# Altium PCB PCB3.PcbDoc
Units mm, origin at the board's own origin, x right, y up, seen from the top; angles counter-clockwise.
Board outline 118.74 x 107.19 mm, 2 copper layers (Top Layer, Bottom Layer); 55 components, 42 nets, 193 pads, 31 vias.
Unrouted connection lines stored in the file: 1.
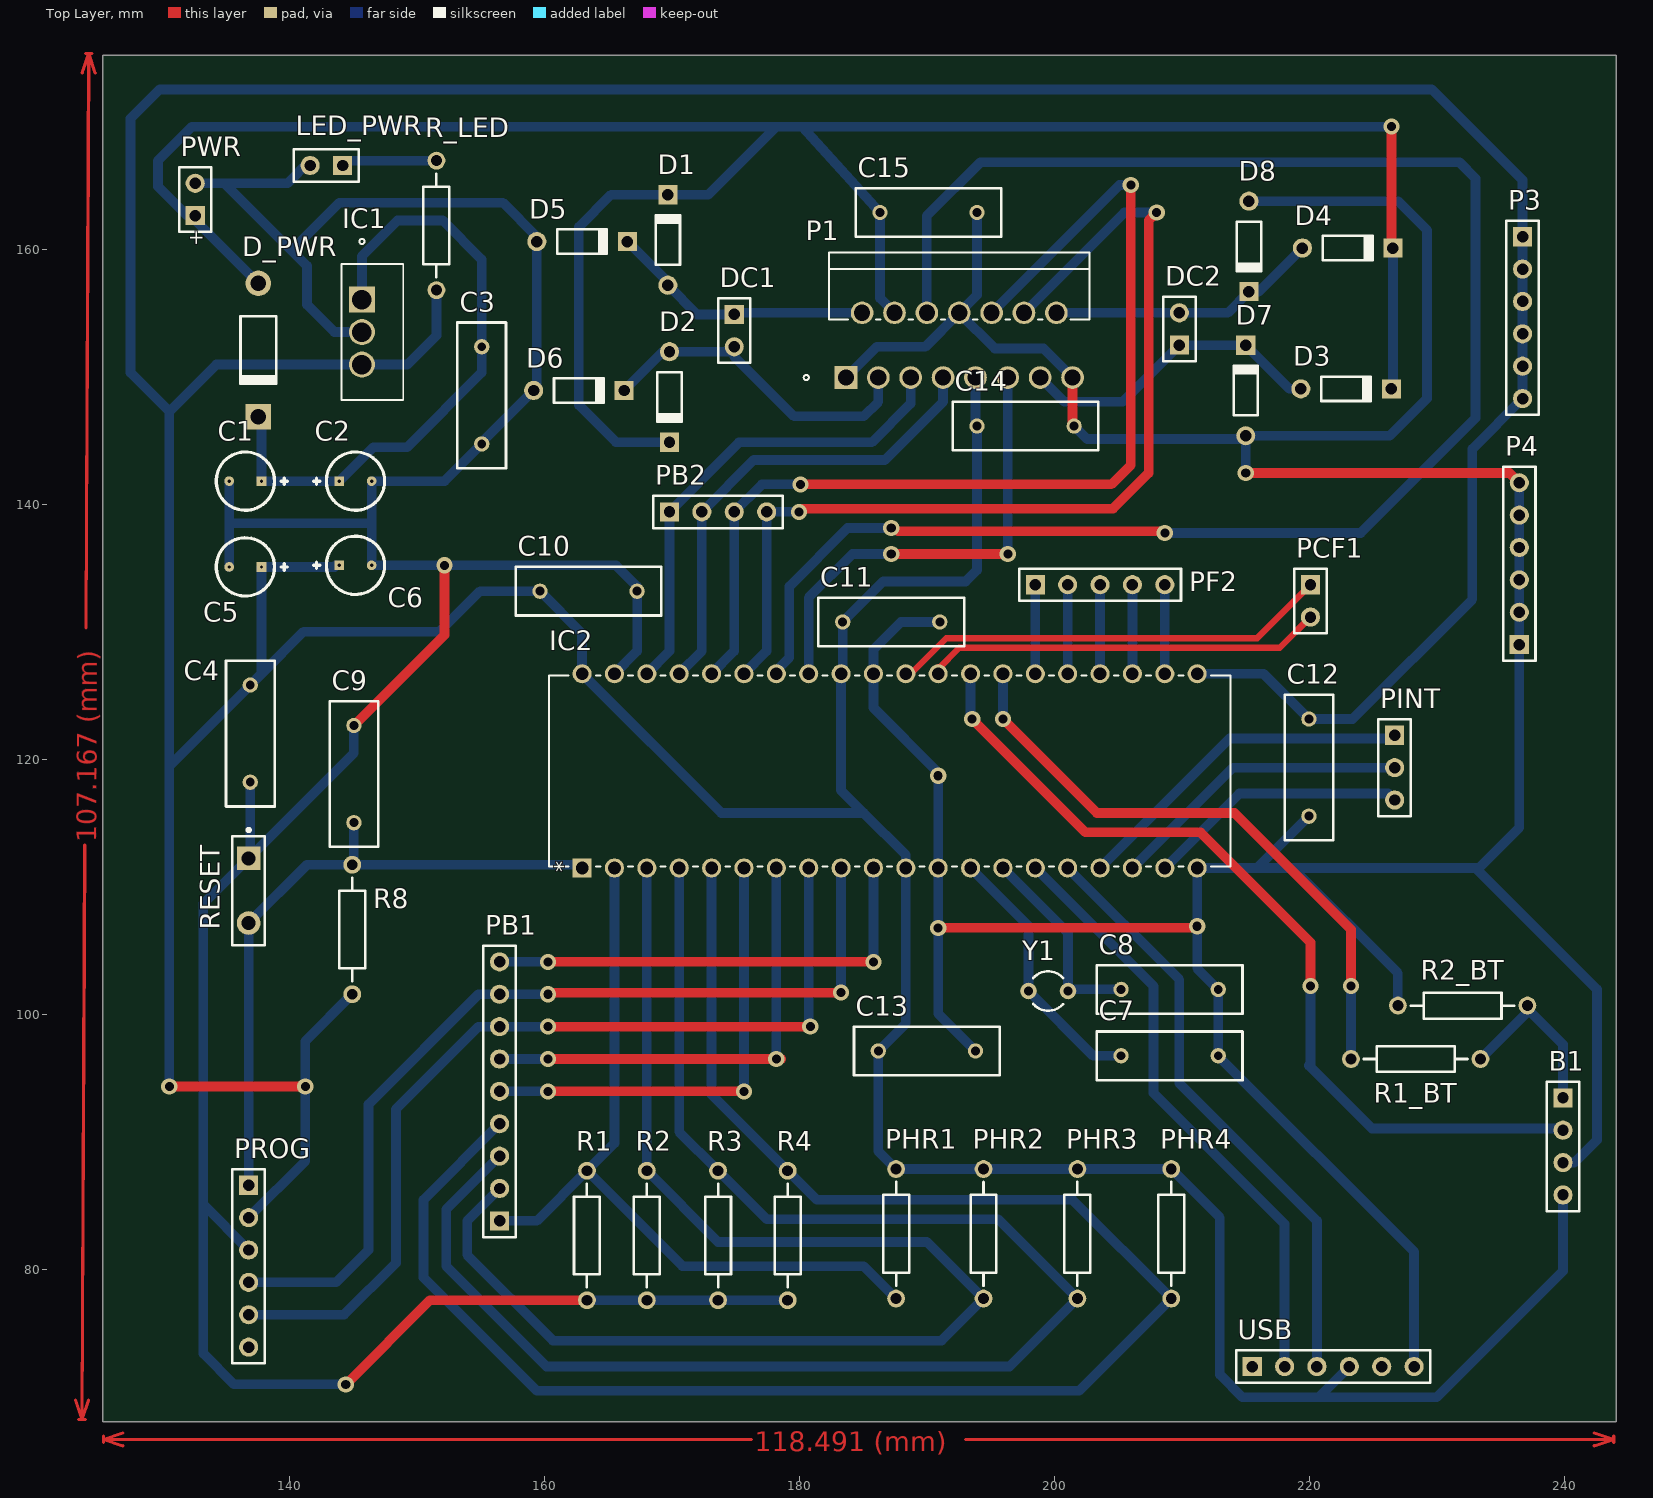
[diagram p0: Top Layer view]
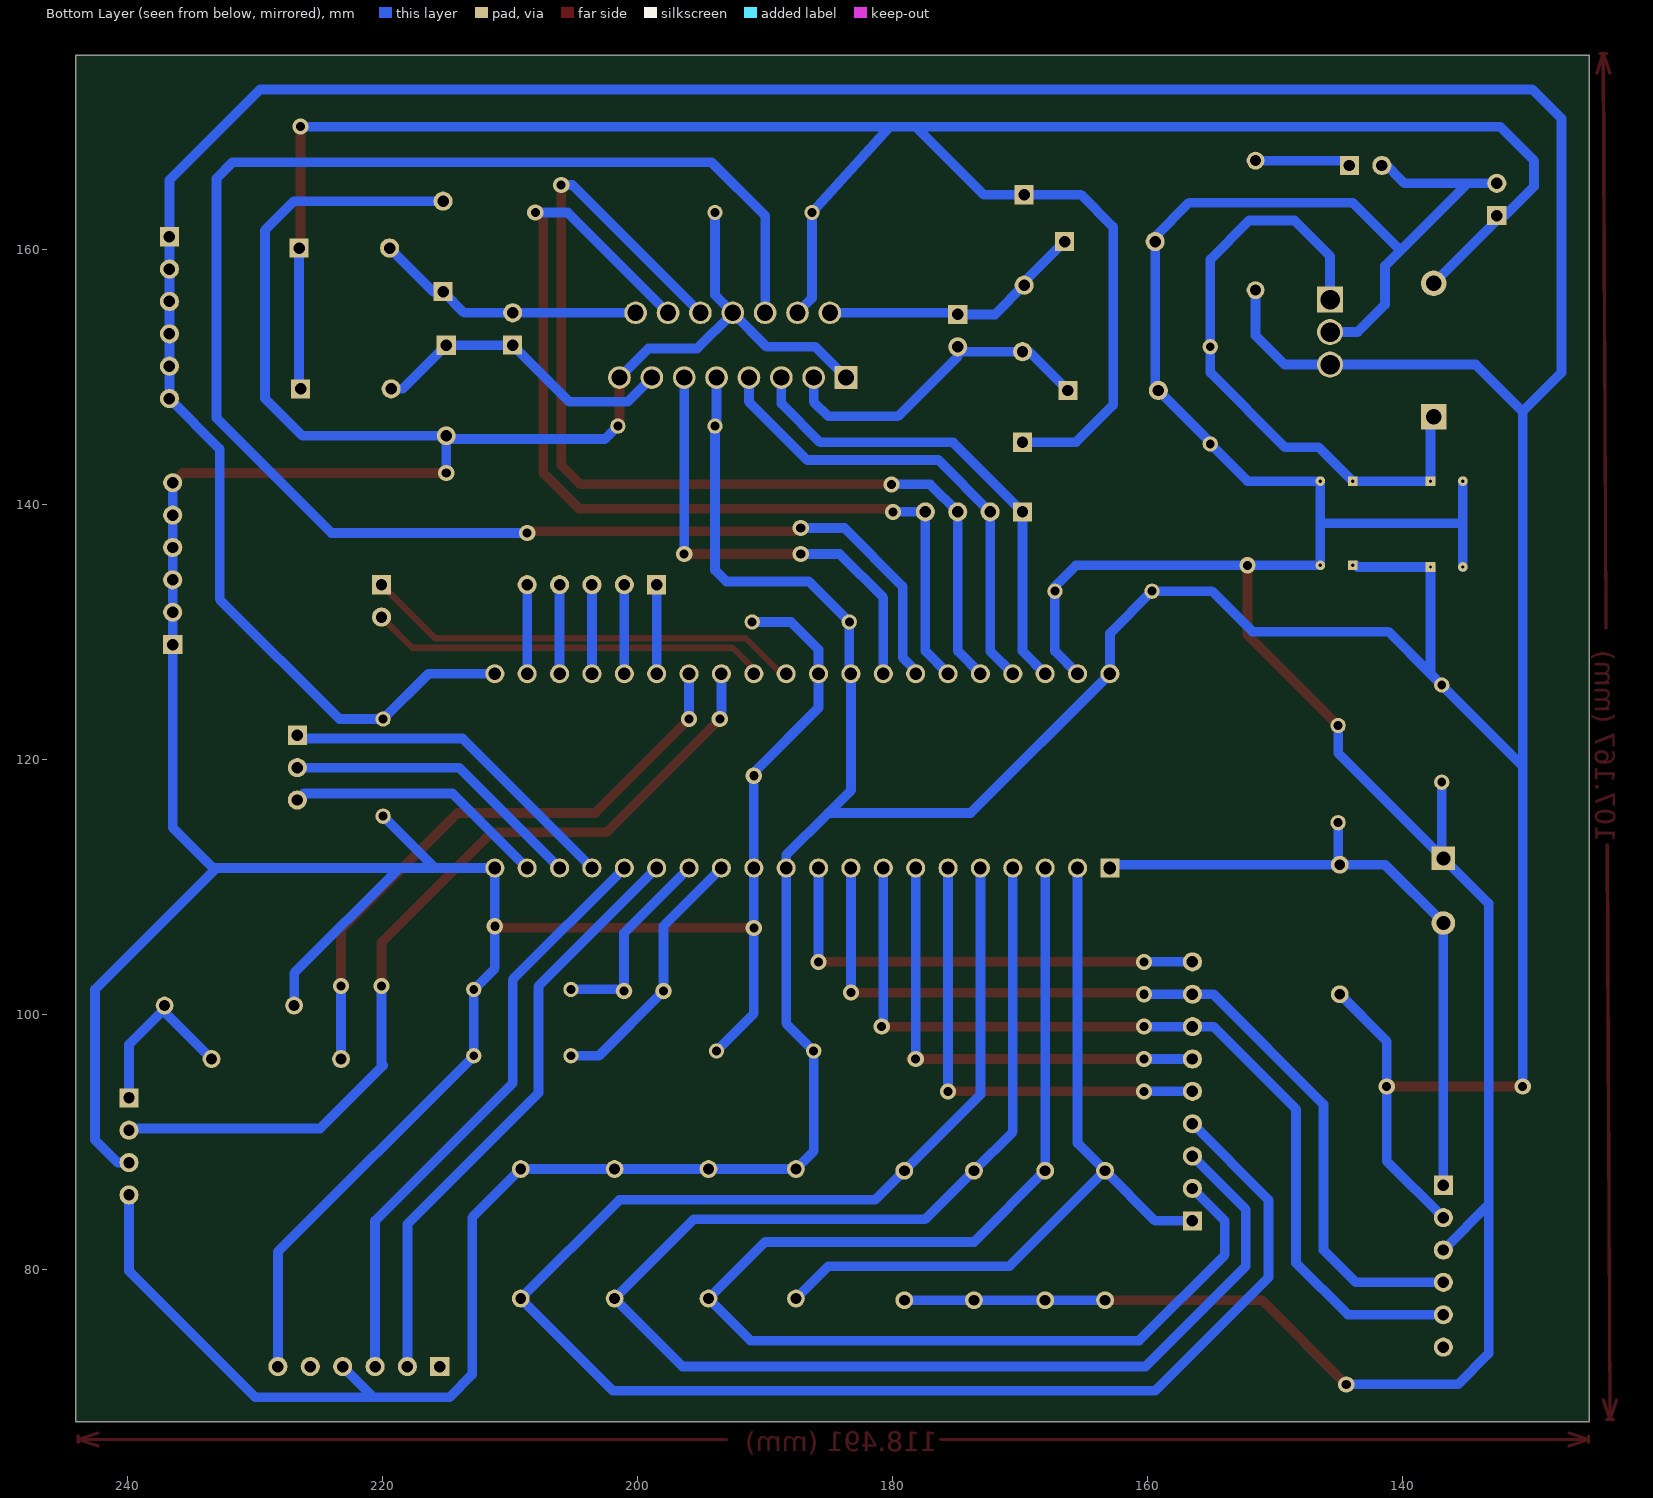
[diagram p1: Bottom Layer view, seen from below]

## Layer stack, top to bottom
Top Solder: solder mask 0.0102, Solder Resist, Dk 3.5
Top Layer: signal copper 0.0356
Dielectric 1: dielectric 0.32, FR-4, Dk 4.8
Bottom Layer: signal copper 0.0356
Bottom Solder: solder mask 0.0102, Solder Resist, Dk 3.5

## Board outline
125.349,68.072 244.094,68.072 244.094,175.26 125.349,175.26

## Design rules (kind name [scope] priority, off if disabled: settings)
Clearance [All] p1: gap=0.254 ignorepadtopadclearanceinfootprint=FALSE
PolygonConnect [All] p1: connectstyle=Relief reliefconductorwidth=0.254 reliefentries=4 polygonreliefangle="90 Angle" airgapwidth=0.254
RoutingVias [All] p1: holewidth=0.711 width=1.27 viastyle="Through Hole" minholewidth=0.711 minwidth=1.27 maxholewidth=0.711 maxwidth=1.27
SolderMaskExpansion [All] p1: expansion=0.102
Width [All] p1: maxlimit=1.27 minlimit=0.508 preferedwidth=0.762
30 further rules are at their usual default settings.

## Components (designator, comment, footprint, x,y, rotation, side; value= is the part's Value field where it differs from the comment)
B1 "" HDR1X4 239.903,93.472 r270 top
C1 "" POL_CAP 136.525,141.859 r180 top value=100pF
C2 "" POL_CAP 145.161,141.859 r0 top value=100pF
C3 "" RAD-0.3 155.067,148.59 r90 top value=100pF
C4 "" RAD-0.3 136.906,122.047 r90 top value=100pF
C5 "" POL_CAP 136.525,135.128 r180 top value=100pF
C6 "" POL_CAP 145.161,135.255 r0 top value=100pF
C7 "Cap" RAD-0.3 209.042,96.774 r180 top value=33pF
C8 "Cap" RAD-0.3 209.042,101.981 r180 top value=33pF
C9 "Cap" RAD-0.3 145.034,118.872 r90 top value=100nF
C10 "Cap" RAD-0.3 163.449,133.223 r0 top value=100nF
C11 "Cap" RAD-0.3 187.198,130.81 r180 top value=100nF
C12 "Cap" RAD-0.3 219.964,119.38 r90 top value=100nF
C13 "Cap" RAD-0.3 189.992,97.155 r180 top value=100nF
C14 "Cap" RAD-0.3 197.739,146.177 r180 top value=100nF
C15 "Cap" RAD-0.3 190.119,162.941 r180 top value=100nF
D1 "Diode 1N914" DO-35 169.672,160.782 r90 top
D2 "Diode 1N914" DO-35 169.799,148.463 r270 top
D3 "Diode 1N914" DO-35 222.885,149.098 r0 top
D4 "Diode 1N914" DO-35 223.012,160.147 r0 top
D5 "Diode 1N914" DO-35 162.941,160.655 r0 top
D6 "Diode 1N914" DO-35 162.687,148.971 r0 top
D7 "Diode 1N914" DO-35 215.011,148.971 r90 top
D8 "Diode 1N914" DO-35 215.265,160.274 r270 top
D_PWR "" DO-41 137.541,152.146 r270 top
DC1 "MOTOR" HDR1X2 174.879,154.94 r270 top
DC2 "MOTOR" HDR1X2 209.804,152.527 r90 top
IC1 "L7805" TO-220FP_STM 145.669,156.103 r270 top
IC2 "dsPIC30F4013" PDIP40_600MC_MCH 162.941,111.506 r90 top
LED_PWR "" HDR1X2 144.145,166.624 r180 top
P1 "L298N" Multiwatt15_V_STM 183.642,149.987 r0 top
P3 "" HDR1X6 236.728,161.036 r270 top
P4 "" HDR1X6 236.474,129.032 r90 top
PB1 "" HDR1X9 156.464,83.82 r90 top
PB2 "" HDR1X4 169.799,139.446 r0 top
PCF1 "" HDR1X2 220.091,133.731 r270 top
PF2 "" HDR1X5 198.501,133.731 r0 top
PHR1 "Res2" AXIAL-0.4 187.579,82.804 r90 top value=1K
PHR2 "Res2" AXIAL-0.4 194.437,82.804 r90 top value=1K
PHR3 "Res2" AXIAL-0.4 201.803,82.804 r90 top value=1K
PHR4 "Res2" AXIAL-0.4 209.169,82.804 r90 top value=1K
PINT "INTERRUPTS / D3" HDR1X3 226.695,121.92 r270 top
PROG "Programator" HDR1X6 136.779,86.614 r270 top
PWR "Battery" BAT-2 132.588,163.957 r90 top
R1 "Res2" AXIAL-0.4 163.322,82.677 r90 top value=1K
R1_BT "Res2" AXIAL-0.4 228.346,96.52 r180 top value=4k7
R2 "Res2" AXIAL-0.4 168.021,82.677 r90 top value=1K
R2_BT "Res2" AXIAL-0.4 232.029,100.711 r0 top value=10k
R3 "Res2" AXIAL-0.4 173.609,82.677 r90 top value=1K
R4 "Res2" AXIAL-0.4 179.07,82.677 r90 top value=1K
R8 "Res2" AXIAL-0.4 144.907,106.68 r270 top value=10K
R_LED "" AXIAL-0.4 151.511,161.925 r270 top value=1K
RESET "SW-PB" SPST-2 136.779,109.728 r270 top
USB "" HDR1X6 215.519,72.39 r0 top
Y1 "XTAL" R38 199.517,101.854 r270 top

## Footprints (in the part's own frame and the unit in brackets; to place one, negate y for a bottom-side part, rotate by r counter-clockwise, add the part's x,y. Pads: shape width x height; smd on the part's side, far side on the other; paste and mask are expansions set on the pad)
AXIAL-0.4 [mm] "Axial Device, Thru-Hole; 2 Leads; 0.4 in Pin Spacing"
  round 1.4 hole 0.85: 1(-5.08,0) 2(5.08,0)
  silkscreen extent -4.06,-1.02 4.06,1.02
BAT-2 [mm] "Battery; 2 Leads"
  rect 1.5x1.5 hole 0.9: 1(-1.27,0)
  round 1.5 hole 0.9: 2(1.27,0)
  silkscreen extent -2.54,-1.27 2.54,1.27
DO-35 [mm] "Diode, Axial; Body 3.8 x 1.9 mm (LxDia. max), Lead Dia. 0.53 mm (max)"
  round 1.5 hole 0.9: 1(-3.55,0)
  rect 1.5x1.5 hole 0.9: 2(3.55,0)
  silkscreen extent -1.95,-0.95 2.05,0.95
DO-41 [mm] "Diode, Axial; Body 5.2 x 2.7 mm (LxDia. max), Lead Dia. 0.86 mm (max)"
  round 2 hole 1.2: 1(-5.23,0)
  rect 2x2 hole 1.2: 2(5.23,0)
  silkscreen extent -2.65,-1.4 2.75,1.4
HDR1X2 [mm] "Connector; Header; 2 Position"
  rect 1.5x1.5 hole 0.9: 1(0,0)
  round 1.5 hole 0.9: 2(2.54,0)
  silkscreen extent -1.27,-1.27 3.81,1.27
HDR1X3 [mm] "Connector; Header; 3 Position"
  rect 1.5x1.5 hole 0.9: 1(0,0)
  round 1.5 hole 0.9: 2(2.54,0) 3(5.08,0)
  silkscreen extent -1.27,-1.27 6.35,1.27
HDR1X4 [mm] "Connector; Header; 4 Position"
  rect 1.5x1.5 hole 0.9: 1(0,0)
  round 1.5 hole 0.9: 2(2.54,0) 3(5.08,0) 4(7.62,0)
  silkscreen extent -1.27,-1.27 8.89,1.27
HDR1X5 [mm] "Connector; Header; 5 Position"
  rect 1.5x1.5 hole 0.9: 1(0,0)
  round 1.5 hole 0.9: 2(2.54,0) 3(5.08,0) 4(7.62,0) 5(10.16,0)
  silkscreen extent -1.27,-1.27 11.43,1.27
HDR1X6 [mm] "Connector; Header; 6 Position"
  rect 1.5x1.5 hole 0.9: 1(0,0)
  round 1.5 hole 0.9: 2(2.54,0) 3(5.08,0) 4(7.62,0) 5(10.16,0) 6(12.7,0)
  silkscreen extent -1.27,-1.27 13.97,1.27
HDR1X9 [mm] "Connector; Header; 9 Position"
  rect 1.5x1.5 hole 0.9: 1(0,0)
  round 1.5 hole 0.9: 2(2.54,0) 3(5.08,0) 4(7.62,0) 5(10.16,0) 6(12.7,0) 7(15.24,0) 8(17.78,0) 9(20.32,0)
  silkscreen extent -1.27,-1.27 21.59,1.27
Multiwatt15_V_STM [mil]
  rect 70x70 / inner round 60 / far side rect 70x70 hole 50 paste-35 mask+0: 1(0,0)
  round 70 / inner round 60 / far side round 70 hole 50 paste-35 mask+0: 2(50,200) 3(100,0) 4(150,200) 5(200,0) 6(250,200) 7(300,0) 8(350,200) 9(400,0) 10(450,200) 11(500,0) 12(550,200) 13(600,0) 14(650,200) 15(700,0)
  silkscreen extent -130,-8 752,386, body extent -48,-15 748,381, height 827
PDIP40_600MC_MCH [mil]
  rect 59x59 / inner round 60 / far side rect 59x59 hole 39 paste-29.5 mask+0: 1(0,0)
  round 59 / inner round 60 / far side round 59 hole 39 paste-29.5 mask+0: 2(0,-100) 3(0,-200) 4(0,-300) 5(0,-400) 6(0,-500) 7(0,-600) 8(0,-700) 9(0,-800) 10(0,-900) 11(0,-1000) 12(0,-1100) 13(0,-1200) 14(0,-1300) 15(0,-1400) 16(0,-1500) 17(0,-1600) 18(0,-1700) 19(0,-1800) 20(0,-1900) 21(600,-1900) 22(600,-1800) 23(600,-1700) 24(600,-1600) 25(600,-1500) 26(600,-1400) 27(600,-1300) 28(600,-1200) 29(600,-1100) 30(600,-1000) 31(600,-900) 32(600,-800) 33(600,-700) 34(600,-600) 35(600,-500) 36(600,-400) 37(600,-300) 38(600,-200) 39(600,-100) 40(600,0)
  silkscreen extent 5,-2002 595,103, body extent -5,-1997 615,97, height 255
POL_CAP [mil]
  rect 30x30 hole 10: 1(-50,0)
  round 30 hole 10: 2(50,0)
  silkscreen extent -130,-90 90,90
R38 [mm] "Crystal, Thru-Hole; 2 Leads; Body 3.1 x 8.2 mm (Dia.xH)"
  round 1.3 hole 0.7: 1(0,1.55) 2(0,-1.55)
  silkscreen extent -1.55,-1.19 1.55,1.17
RAD-0.3 [mm] "Radial Cap, Thru-Hole; 2 Leads; 0.3 in Pin Spacing"
  round 1.2 hole 0.7: 1(-3.81,0) 2(3.81,0)
  silkscreen extent -5.71,-1.91 5.71,1.91
SPST-2 [mm] "Switch; 2 Leads"
  rect 1.85x1.85 hole 1.1: 1(-2.54,0)
  round 1.85 hole 1.1: 2(2.54,0)
  silkscreen extent -4.89,-1.27 4.28,1.27
TO-220FP_STM [mil]
  rect 80x80 / inner round 60 / far side rect 80x80 hole 60 paste-40 mask-40: 1(0,0)
  round 80 / inner round 60 / far side round 80 hole 60 paste-40 mask-40: 2(100.39,0) 3(200.79,0)
  silkscreen extent -188,-64 310,128, body extent -105,-59 305,123, height 646

## Part data
B1 PB2: library part "Header 4", "Header, 4-Pin", LatestRevisionDate=17-Jul-2002, LatestRevisionNote="Re-released for DXP Platform.", Publisher="Altium Limited"
C1 C2 C5 C6: library part "Cap Pol1", "Polarized Capacitor (Radial)", LatestRevisionDate=17-Jul-2002, LatestRevisionNote="Re-released for DXP Platform.", PackageDescription="Polarized Capacitor (Radial); 2 Leads", PackageReference=RB7.6-15, Published=8-Jun-2000, Publisher="Altium Limited"
C3 C4: library part Cap, "Capacitor", LatestRevisionDate=17-Jul-2002, LatestRevisionNote="Re-released for DXP Platform.", PackageDescription="Radial Cap, Thru-Hole; 2 Leads; 0.3 in Pin Spacing", PackageReference=RAD-0.3, Published=8-Jun-2000, Publisher="Altium Limited"
C7 C8 C9 C10 C11 C12 C13 C14 C15: "Capacitor", LatestRevisionDate=17-Jul-2002, LatestRevisionNote="Re-released for DXP Platform.", PackageDescription="Radial Cap, Thru-Hole; 2 Leads; 0.3 in Pin Spacing", PackageReference=RAD-0.3, Published=8-Jun-2000, Publisher="Altium Limited"
D1 D2 D3 D4 D5 D6 D7 D8: "High Conductance Fast Diode", Code_JEDEC=DO-204-AH, ComponentLink1Description="Manufacturer Link", ComponentLink1URL=http://www.fairchildsemi.com/, ComponentLink2Description=Datasheet, ComponentLink2URL=http://www.fairchildsemi.com/ds/1N%2F1N4448.pdf, DatasheetVersion=1997, LatestRevisionDate=17-Jul-2002, LatestRevisionNote="Re-released for DXP Platform.", PackageDescription="Diode, Axial; Body 3.8 x 1.9 mm (LxDia. max), Lead Dia. 0.53 mm (max)", PackageReference=DO-35, Published=8-Jun-2000, Publisher="Altium Limited"
D_PWR: library part "Diode 1N4007", "1 Amp General Purpose Rectifier", Code_JEDEC=DO-204-AL, ComponentLink1Description="Manufacturer Link", ComponentLink1URL=http://www.fairchildsemi.com/, ComponentLink2Description=Datasheet, ComponentLink2URL=http://www.fairchildsemi.com/ds/1N%2F1N4001.pdf, DatasheetVersion=1998, LatestRevisionDate=17-Jul-2002, LatestRevisionNote="Re-released for DXP Platform.", PackageDescription="Diode, Axial; Body 5.2 x 2.7 mm (LxDia. max), Lead Dia. 0.86 mm (max)", PackageReference=DO-41, PackageVersion=Aug-1999, Published=8-Jun-2000, Publisher="Altium Limited"
DC1 DC2 PCF1: library part "Header 2", "Header, 2-Pin", LatestRevisionDate=17-Jul-2002, LatestRevisionNote="Re-released for DXP Platform.", Publisher="Altium Limited"
IC1: "Linear Voltage Regulator IC 1 Output 1.5A D2PAK", Package="TO-263-3 Inchange Semiconductor", Availability=Unavailable, MF=STMicroelectronics, MP=L7805, Price=None, SnapEDA_Link=https://www.snapeda.com/parts/L7805/STMicroelectronics/view-part/563125/?ref=snap
IC2: library part IC_40
LED_PWR: library part LED1, "Typical RED GaAs LED", LatestRevisionDate=08-Jul-2005, LatestRevisionNote="Mech Layer 1 removed.", PackageDescription="LED; 2 Leads", PackageReference=LED-1, Published=8-Jun-2000, Publisher="Altium Limited"
P3 P4 PROG USB: library part "Header 6", "Header, 6-Pin", LatestRevisionDate=17-Jul-2002, LatestRevisionNote="Re-released for DXP Platform.", Publisher="Altium Limited"
PB1: library part "Header 9", "Header, 9-Pin", LatestRevisionDate=17-Jul-2002, LatestRevisionNote="Re-released for DXP Platform.", Publisher="Altium Limited"
PF2: library part "Header 5", "Header, 5-Pin", LatestRevisionDate=17-Jul-2002, LatestRevisionNote="Re-released for DXP Platform.", Publisher="Altium Limited"
PHR1 PHR2 PHR3 PHR4 R1 R1_BT R2 R2_BT R3 R4 R8: "Resistor", LatestRevisionDate=17-Jul-2002, LatestRevisionNote="Re-released for DXP Platform.", PackageDescription="Axial Device, Thru-Hole; 2 Leads; 0.4 in Pin Spacing", PackageReference=AXIAL-0.4, Published=8-Jun-2000, Publisher="Altium Limited"
PINT: library part "Header 3", "Header, 3-Pin", LatestRevisionDate=17-Jul-2002, LatestRevisionNote="Re-released for DXP Platform.", Publisher="Altium Limited"
PWR: "Multicell Battery", LatestRevisionDate=17-Jul-2002, LatestRevisionNote="Re-released for DXP Platform.", PackageDescription="Battery; 2 Leads", PackageReference=BAT-2, Published=24-Mar-1999, Publisher="Altium Limited"
R_LED: library part Res2, "Resistor", LatestRevisionDate=17-Jul-2002, LatestRevisionNote="Re-released for DXP Platform.", PackageDescription="Axial Device, Thru-Hole; 2 Leads; 0.4 in Pin Spacing", PackageReference=AXIAL-0.4, Published=8-Jun-2000, Publisher="Altium Limited"
RESET: "Switch", LatestRevisionDate=17-Jul-2002, LatestRevisionNote="Re-released for DXP Platform.", PackageDescription="Switch; 2 Leads", PackageReference=SPST-2, Published=24-Mar-1999, Publisher="Altium Limited"
Y1: "Crystal Oscillator", LatestRevisionDate=17-Jul-2002, LatestRevisionNote="Re-released for DXP Platform.", PackageDescription="Crystal, Thru-Hole; 2 Leads; Body 3.1 x 8.2 mm (Dia.xH)", PackageReference=R38, Published=8-Jun-2000, Publisher="Altium Limited"

## Via types
v1: diameter 1.27, hole 0.711, Top Layer to Bottom Layer, 31 vias

## Nets (pads, with @x,y where several pads share a name; then routed paths per layer and width w, separated by ;. In a path a pad name is that pad's centre, name@x,y a point inside that pad or via, vN(x,y) a via of type N, cw(c..) or ccw(c..) an arc to the next point about the centre after c; other vN are vias at no path point)
+5: B1.4 C4.2 C5.1 C6.1 C10.1 C11.2 C12.2 C13.2 C14.2 IC1.3 IC2.11 IC2.21 IC2.32 IC2.40 P1.9 P3.1 P3.2 P3.3 P3.4 P3.5 P3.6 PHR1.2 PHR2.2 PHR3.2 PHR4.2 PROG.2 R8.2 R_LED.2 USB.4 | length 547.4
  Top Layer w0.762: v1(130.556,94.361) v1(141.224,94.361)
  Bottom Layer w0.762: v1(130.556,94.361) 130.556,147.32 ; 130.683,119.634 C4.2 137.795,126.746 ; PROG.2 141.224,88.519 v1(141.224,94.361) 141.224,97.917 R8.2 ; C5.1 137.795,126.746 ; 138.303,135.128 143.51,135.128 C6.1@143.637,135.255 ; R_LED.2 151.511,153.289 149.225,151.003 IC1.3 134.239,151.003 130.556,147.32 ; IC2.32 183.261,117.602 185.039,115.824 ; IC2.32@183.388,126.619 C11.2@183.388,130.556 ; C11.2 186.563,133.985 193.04,133.985 193.929,134.874 C14.2 193.802,146.304 P1.9 ; IC2.21 216.408,126.746 C12.2 223.393,123.19 232.791,132.588 232.791,144.399 P3.6 P3.5 P3.4 P3.3 P3.2 P3.1 236.728,165.481 229.616,172.593 129.794,172.593 127.508,170.307 127.508,150.368 130.556,147.32 ; USB.4 220.726,69.977 ; B1.4 239.903,79.883 229.997,69.977 220.726,69.977 ; 137.795,126.746 141.097,130.048 151.765,130.048 154.94,133.223 C10.1 162.941,129.921 IC2.40 173.863,115.824 185.039,115.824 ; 185.039,115.824 188.341,112.522 IC2.11 188.341,99.314 C13.2 186.182,89.281 PHR1.2 PHR2.2 PHR3.2 PHR4.2 212.979,84.074 212.979,71.755 214.757,69.977 220.726,69.977
GND: B1.3 C1.2 C2.2 C3.1 C4.1 C5.2 C6.2 C7.1 C8.1 C9.2 C10.2 C11.1 C12.1 C13.1 C14.1 C15.1 D5.1 D6.1 D7.1 D8.1 IC1.2 IC2.12 IC2.20 IC2.31 IC2.39 LED_PWR.2 P1.1 P1.8 P1.15 P4.1 P4.2 P4.3 P4.4 P4.5 P4.6 PROG.3 PWR.2 R1.1 R2.1 R2_BT.1 R3.1 R4.1 RESET.1 USB.6 | length 587.4
  Top Layer w0.762: v1(144.399,70.993) 151.003,77.597 R1.1 ; C9.2 152.146,129.794 v1(152.146,135.255) ; v1(190.881,106.807) 211.074,106.807 v1(211.201,106.934) ; P1.15 201.422,146.304 C14.1 ; v1(215.011,142.494) 235.712,142.494 P4.6
  Bottom Layer w0.762: PWR.2 134.874,165.227 ; C5.2 135.255,138.557 ; C1.2 135.255,138.557 ; PROG.3 133.223,85.09 ; C4.1 RESET.1@136.906,112.395 ; LED_PWR.2@141.605,167.005 139.827,165.227 134.874,165.227 ; v1(144.399,70.993) 135.636,70.993 133.223,73.406 133.223,85.09 ; C9.2 145.034,120.523 RESET.1@136.906,112.395 ; IC1.2 143.5,153.553 141.351,155.702 141.351,158.75 140.144,159.957 ; R1.1 R2.1 R3.1 R4.1 ; IC2.39 167.259,128.524 C10.2 167.259,133.604 165.608,135.255 v1(152.146,135.255) C6.2 146.431,138.557 ; P1.1 186.055,152.4 189.865,152.4 P1.8 ; C11.1 187.96,130.81 185.801,128.651 IC2.31 185.801,124.079 190.881,118.999 v1(190.881,118.745) IC2.12 v1(190.881,106.807) 190.881,100.076 C13.1 ; C15.1 193.929,156.464 P1.8 ; P1.15 199.136,152.273 195.326,152.273 P1.8 ; C14.1 202.565,145.161 214.751,145.161 D7.1 ; v1@215.011,142.24 v1(215.011,142.494) D7.1 ; D8.1 226.955,163.824 229.235,161.544 229.235,148.336 226.32,145.421 D7.1 ; C12.1 215.9,111.506 ; R2_BT.1@226.949,100.584 R2_BT.1 226.949,103.251 218.694,111.506 ; USB.6 228.219,81.407 C7.1 C8.1 211.201,103.632 v1(211.201,106.934) IC2.20 215.9,111.506 ; P4.6 P4.5 P4.4 P4.3 P4.2 P4.1 236.474,114.681 233.299,111.506 ; B1.3 240.792,88.392 242.57,90.17 242.57,101.981 233.172,111.379 233.299,111.506 ; 133.223,85.09 133.223,108.712 RESET.1 RESET.1@136.906,112.395 ; 134.874,165.227 140.144,159.957 ; 135.255,138.557 146.431,138.557 ; 140.144,159.957 143.891,163.703 156.718,163.703 159.391,161.03 D5.1 159.391,149.225 D6.1 155.067,144.901 C3.1 152.146,141.859 C2.2 146.431,138.557 ; 215.9,111.506 218.694,111.506 ; 218.694,111.506 233.299,111.506
MCLR: C9.1 IC2.1 PROG.1 R8.1 RESET.2 | length 52.4
  Bottom Layer w0.762: RESET.2@136.525,107.315 RESET.2@136.779,107.061 ; PROG.1 RESET.2@136.779,107.061 ; C9.1 145.034,111.887 R8.1 ; IC2.1 162.687,111.76 R8.1 ; RESET.2@136.779,107.061 RESET.2 141.351,111.76 R8.1
NetC1_1: C1.1 C2.1 C3.2 D_PWR.2 IC1.1 | length 50.1
  Bottom Layer w0.762: D_PWR.2 137.795,146.662 C1.1 C2.1 146.558,144.526 149.225,144.526 155.067,150.368 C3.2 155.067,159.258 152.019,162.306 148.463,162.306 145.669,159.512 IC1.1
NetLED_PWR_1: LED_PWR.1 R_LED.1 | length 7.4
  Bottom Layer w0.762: LED_PWR.1@144.145,167.005 R_LED.1
OSC1: C7.2 IC2.13 Y1.2 | length 20.9
  Bottom Layer w0.762: IC2.13 197.967,106.96 Y1.2 203.047,96.774 C7.2
OSC2: C8.2 IC2.14 Y1.1 | length 16
  Bottom Layer w0.762: IC2.14 201.067,106.4 Y1.1 201.194,101.981 C8.2
OUT1: D1.1 D5.2 DC1.1 P1.2 | length 21
  Bottom Layer w0.762: D5.2 169.672,157.474 D1.1 171.964,154.94 DC1.1 175.006,155.067 P1.2
OUT2: D2.1 D6.2 DC1.2 P1.3 | length 26.6
  Bottom Layer w0.762: D6.2 169.279,152.013 D2.1 174.492,152.013 DC1.2 174.879,151.638 179.578,146.939 185.039,146.939 186.182,148.082 P1.3 P1.3@186.182,150.123
OUT3: D3.1 D7.2 DC2.1 P1.13 | length 24.5
  Bottom Layer w0.762: P1.13 200.787,148.082 205.359,148.082 DC2.1 209.81,152.521 D7.2 218.434,149.098 D3.1
OUT4: D4.1 D8.2 DC2.2 P1.14 | length 21.4
  Bottom Layer w0.762: P1.14 DC2.2 213.608,155.067 D8.2 216.039,156.724 D4.1
Photores1: IC2.2 PB1.1 PHR1.1 R1.2 | length 61.5
  Bottom Layer w0.762: PB1.1 159.385,83.82 R1.2 ; IC2.2 165.481,89.916 R1.2 ; PHR1.1 185.039,80.264 170.815,80.264 R1.2
Photores2: IC2.3 PB1.2 PHR2.1 R2.2 | length 105.2
  Bottom Layer w0.762: PB1.2 153.924,83.82 153.924,81.153 160.655,74.422 191.135,74.422 PHR2.1 189.992,82.169 173.609,82.169 R2.2 IC2.3
Photores3: IC2.4 PB1.3 PHR3.1 R3.2 | length 123
  Bottom Layer w0.762: PB1.3@156.464,88.646 PB1.3 152.273,84.709 152.273,80.264 160.147,72.39 196.469,72.39 PHR3.1 195.58,83.947 177.419,83.947 R3.2 170.561,90.805 IC2.4
Photores4: IC2.5 PB1.4 PHR4.1 R4.2 | length 140.4
  Bottom Layer w0.762: PB1.4 150.495,85.471 150.495,79.375 159.385,70.485 201.93,70.485 PHR4.1 201.422,85.471 181.356,85.471 R4.2 173.101,93.726 IC2.5
RA11: IC2.17 PINT.1 | length 27.3
  Bottom Layer w0.762: IC2.17 213.741,121.666 226.314,121.666 PINT.1@226.568,121.92
RB4: IC2.6 PB1.5 | length 35.9
  Top Layer w0.762: v1(160.274,93.98) v1@175.387,93.98
  Bottom Layer w0.762: PB1.5 v1@159.766,93.98 ; v1(175.641,93.98) IC2.6
RB5: IC2.7 PB1.6 | length 36.8
  Top Layer w0.762: v1(160.274,96.52) v1(178.181,96.52) v1@178.562,96.52
  Bottom Layer w0.762: PB1.6 v1@160.02,96.52 ; v1(178.181,96.52) IC2.7
RB6/PGC: IC2.8 PB1.7 PROG.5 | length 72.9
  Top Layer w0.762: v1(160.274,99.06) v1(180.848,99.06)
  Bottom Layer w0.762: PROG.5 144.272,76.454 148.336,80.518 148.336,92.583 154.813,99.06 PB1.7 v1@160.147,99.06 ; IC2.8 180.721,99.187 v1(180.848,99.06)
RB7/PGD: IC2.9 PB1.8 PROG.4 | length 72.4
  Top Layer w0.762: v1(160.274,101.6) 160.401,101.727 v1(183.261,101.727)
  Bottom Layer w0.762: PROG.4 143.637,78.994 146.177,81.534 146.177,92.964 154.813,101.6 PB1.8 v1(160.274,101.6) ; v1(183.261,101.727) IC2.9
RB8: IC2.10 PB1.9 | length 36.7
  Top Layer w0.762: v1(160.274,104.14) v1(185.801,104.14)
  Bottom Layer w0.762: PB1.9 v1(160.274,104.14) ; v1(185.801,104.14) IC2.10
RB9: IC2.38 P1.5 PB2.1 | length 37.9
  Bottom Layer w0.762: IC2.38 169.799,128.524 PB2.1 175.26,144.907 185.674,144.907 188.722,147.955 P1.5
RB10: IC2.37 P1.7 PB2.2 | length 37.8
  Bottom Layer w0.762: IC2.37 172.339,128.524 PB2.2 176.403,143.51 186.69,143.51 191.262,148.082 P1.7
RB11: IC2.36 P1.10 PB2.3 | length 83.1
  Top Layer w0.762: v1(180.086,141.605) 204.47,141.605 205.994,143.129 v1(205.994,165.1)
  Bottom Layer w0.762: IC2.36 174.879,128.524 PB2.3 177.038,141.605 v1(180.086,141.605) ; P1.10 205.105,165.1 v1(205.994,165.1)
RB12: IC2.35 P1.12 PB2.4 | length 79.1
  Top Layer w0.762: v1(179.959,139.446) 180.213,139.7 204.597,139.7 207.391,142.494 207.391,162.306 v1(208.026,162.941)
  Bottom Layer w0.762: IC2.35 177.419,128.524 PB2.4 v1(179.959,139.446) ; P1.12 205.486,162.941 v1(208.026,162.941)
RD0: IC2.34 P1.6 | length 138.7
  Top Layer w0.762: v1(187.198,138.176) 187.325,138.303 187.706,137.922 208.534,137.922 v1(208.661,137.795)
  Bottom Layer w0.762: IC2.34 178.181,127 179.197,128.016 179.197,133.604 183.769,138.176 v1(187.198,138.176) ; P1.6 189.992,162.687 194.183,166.878 231.775,166.878 233.045,165.608 233.045,146.812 224.028,137.795 v1(208.661,137.795)
RD1: IC2.33 P1.11 | length 36.9
  Top Layer w0.762: v1(187.198,136.144) v1(196.342,136.144)
  Bottom Layer w0.762: IC2.33 180.721,132.715 184.15,136.144 v1(187.198,136.144) ; v1(196.342,136.144) P1.11
RD2: IC2.22 PF2.5 | length 7
  Bottom Layer w0.762: IC2.22 PF2.5
RD3: IC2.19 PINT.3 | length 20.7
  Bottom Layer w0.762: IC2.19 214.503,117.348 226.187,117.348 PINT.3
RD8: IC2.23 PF2.4 | length 7
  Bottom Layer w0.762: IC2.23 PF2.4
RD9: IC2.18 PINT.2 | length 23.8
  Bottom Layer w0.762: IC2.18 213.995,119.38 PINT.2
RF0: IC2.30 PCF1.1 | length 35
  Top Layer w0.508: IC2.30 188.722,126.746 191.516,129.54 215.9,129.54 PCF1.1
  Bottom Layer w0.762: IC2.30 IC2.30@188.595,127
RF1: IC2.29 PCF1.2 | length 31.6
  Top Layer w0.508: IC2.29@190.881,127.127 192.532,128.778 217.678,128.778 PCF1.2
  Top Layer w0.762: IC2.29 IC2.29@190.881,127.127
  Bottom Layer w0.762: IC2.29 IC2.29@191.135,127
RF2: IC2.26 PF2.1 | length 7
  Bottom Layer w0.762: IC2.26 PF2.1
RF3: IC2.25 PF2.2 | length 7
  Bottom Layer w0.762: IC2.25 PF2.2
RF6: IC2.24 PF2.3 | length 7
  Bottom Layer w0.762: IC2.24 PF2.3
Rx_bluetooth: B1.1 R1_BT.1 R2_BT.2 | length 13.2
  Bottom Layer w0.762: R1_BT.1 237.236,100.33 239.903,97.663 B1.1@239.903,93.599
Rx_usb: IC2.15 USB.2 | length 47.2
  Bottom Layer w0.762: IC2.15 207.772,102.235 207.772,93.853 218.059,83.566 USB.2
"SUPPLY VOLTAGE": C15.2 D1.2 D2.2 D3.2 D4.2 D_PWR.1 P1.4 PWR.1 | length 192.3
  Top Layer w0.762: v1(226.441,169.672) 226.441,160.268 D4.2
  Bottom Layer w0.762: D_PWR.1 132.588,162.329 PWR.1 131.953,162.687 129.667,164.973 129.667,167.005 132.334,169.672 179.578,169.672 180.225,169.66 ; D2.2 165.602,144.913 162.687,147.828 162.687,161.798 165.221,164.332 D1.2 172.841,164.332 178.169,169.66 180.225,169.66 ; P1.4 186.309,156.21 C15.2 180.225,169.66 ; D3.2 226.562,149.225 D4.2 ; v1@226.441,169.66 180.225,169.66
Tx_bluetooth: B1.2 IC2.28 | length 68.7
  Top Layer w0.762: v1(193.548,123.19) 202.438,114.3 211.455,114.3 220.091,105.664 v1(220.091,102.235)
  Bottom Layer w0.762: v1@193.421,123.317 IC2.28 ; v1@220.091,101.981 220.091,96.139 219.964,96.012 224.917,91.059 B1.2@239.903,91.059
Tx_usb: IC2.16 USB.3 | length 47.2
  Bottom Layer w0.762: IC2.16 209.804,102.743 209.804,94.615 220.599,83.82 USB.3
U2TX: IC2.27 R1_BT.2 | length 48
  Top Layer w0.762: v1(195.961,123.19) 203.327,115.824 214.122,115.824 223.266,106.68 v1(223.266,102.235)
  Bottom Layer w0.762: v1@195.961,123.444 IC2.27 ; v1(223.266,102.235) R1_BT.2 R1_BT.2@223.52,96.266
pads on no net: PROG.6 USB.1 USB.5
copper on no net: | length 206.7
  Top Layer w0.254: 123.201,69.764 123.701,68.238 ; 123.447,68.239 123.955,68.236 ; 123.719,173.881 124.235,175.403 ; 123.926,113.289 123.701,68.238 ; 123.981,175.404 124.489,175.402 ; 124.01,130.352 124.235,175.403 ; 124.217,69.759 123.701,68.238 ; 124.735,173.876 124.235,175.403 ; 125.39,66.421 125.39,66.929 ; 126.914,66.167 125.39,66.675 ; 126.914,67.183 125.39,66.675 ; 176.23,66.675 125.39,66.675 ; 193.04,66.675 243.881,66.675 ; 242.357,66.167 243.881,66.675 ; 242.357,67.183 243.881,66.675 ; 243.881,66.421 243.881,66.929

## Other copper
Top Layer:
  text "107.167 (mm)" at 124.841,113.538 h1.52 r89.71
  text "118.491 (mm)" at 176.484,65.761 h1.52

## Text inside footprints (layer, text, board x,y; h text height)
IC2: Top Overlay "*" at 162.065,111.188 h1.27 r90; Mechanical 13 "*" at 163.576,111.697 h1.27 r90
P1: Mechanical 13 "TAB" at 192.056,158.705 h0.64
PWR: Top Overlay "+" at 133.165,160.287 h1.15 r90